# EAGLE board PiLoraGatewayV2.7 (EAGLE 6.5.0)
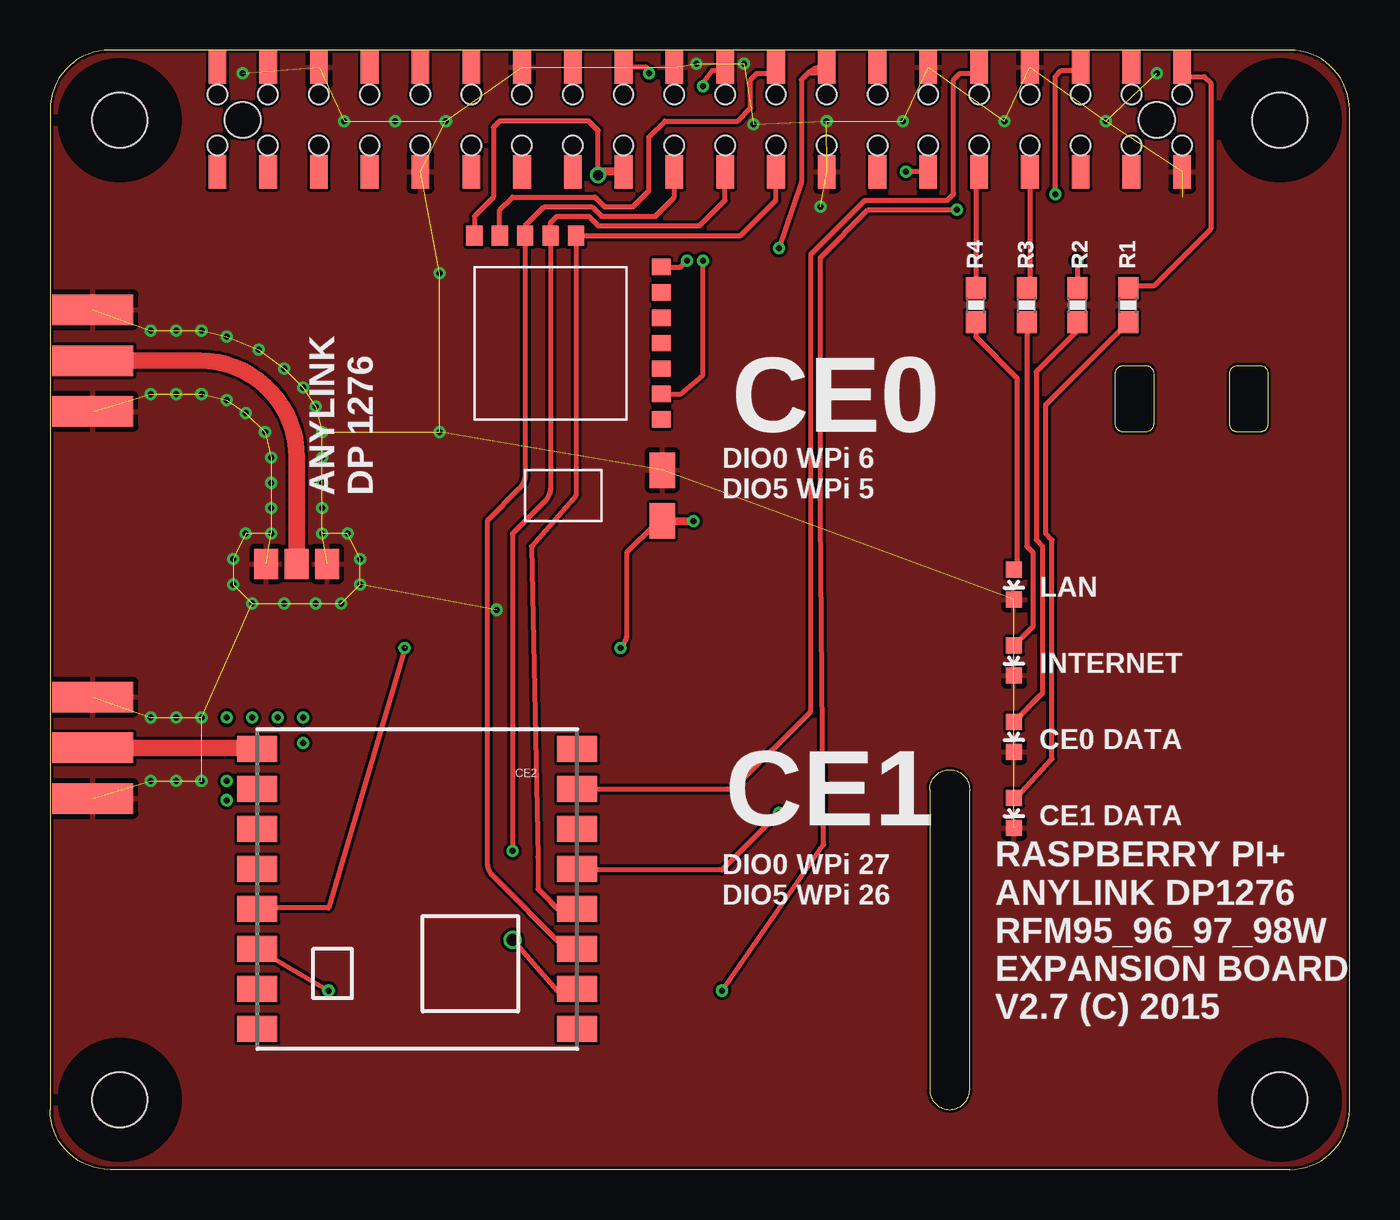
[diagram p0: board, top side]
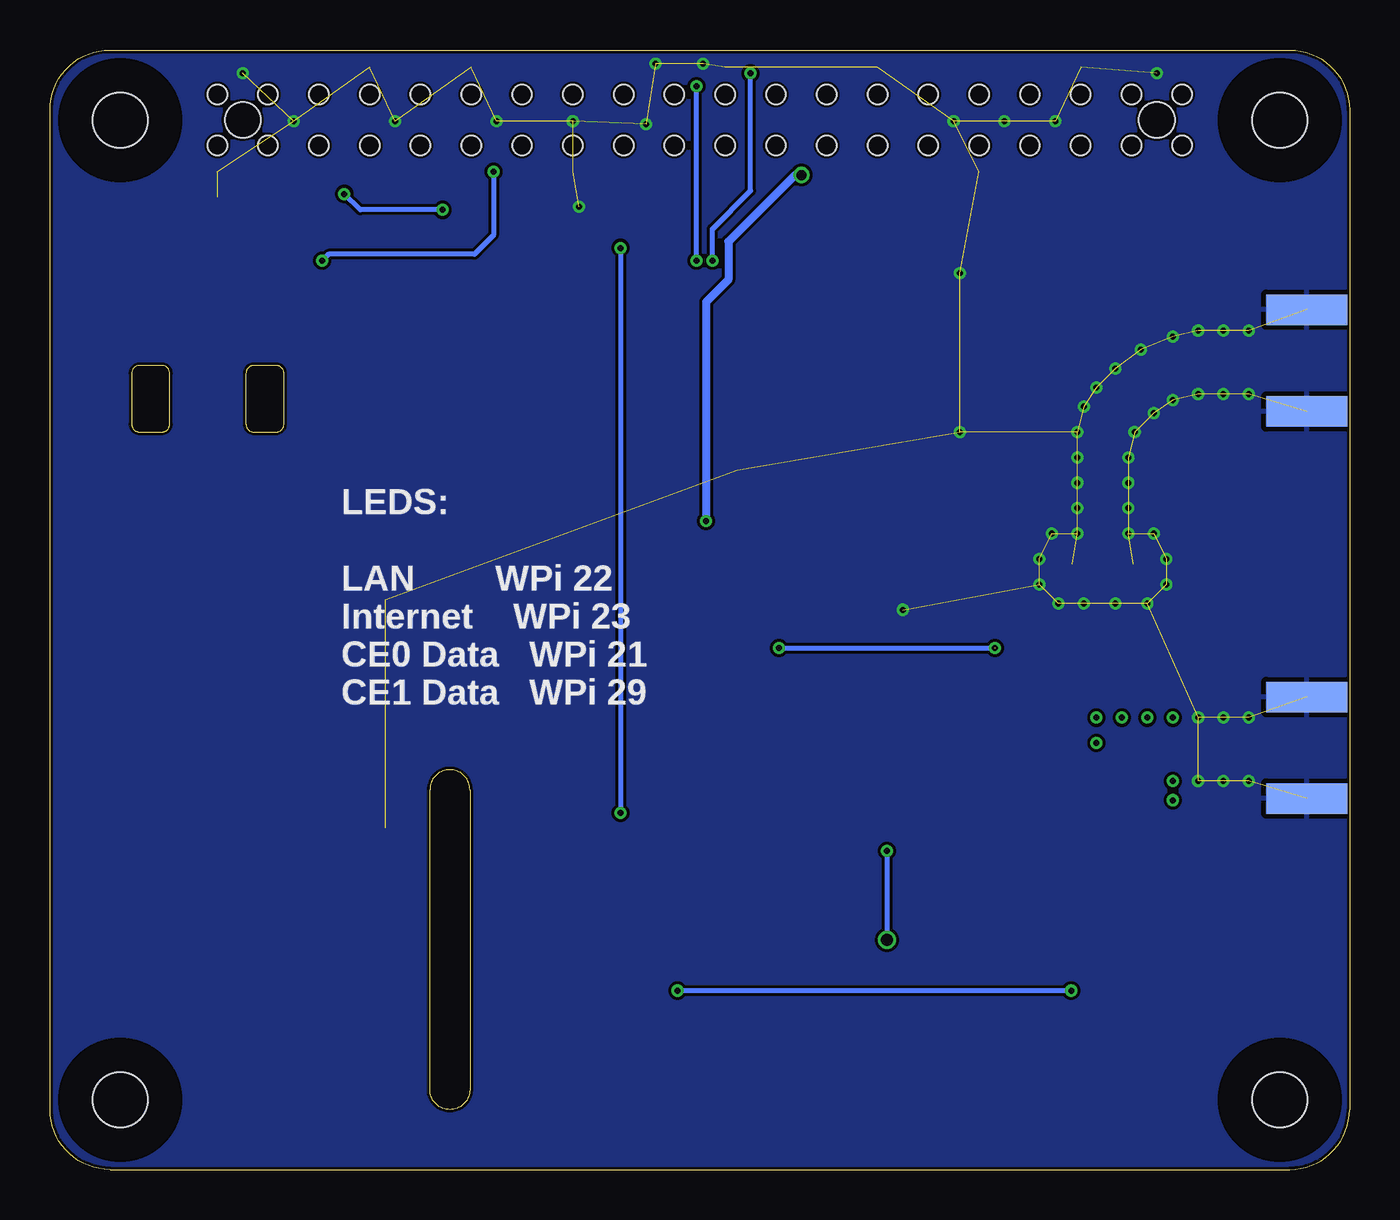
[diagram p1: board, bottom side, seen from below]

Size 65 x 56 mm. Coordinates in mm from the lower left corner, seen from the top.
Outline: 59.41,40.22 60.51,40.22 arc-90 60.92,39.82 60.92,37.29 arc-90 60.51,36.89 59.41,36.89 arc-90 59.01,37.29 59.01,39.82 arc-90 59.41,40.22
Outline: 53.69,40.22 54.8,40.22 arc-90 55.2,39.82 55.2,37.29 arc-90 54.8,36.89 53.69,36.89 arc-90 53.29,37.29 53.29,39.82 arc-90 53.69,40.22
Outline: 62,0 arc90 65,3 65,53 arc90 62,56 3,56 arc90 0,53 0,3 arc90 3,0 62,0
Outline: 44,19 44,4 arc90 45,3 arc90 46,4 46,19 arc90 45,20 arc90 44,19
Copper layers (1*16): Top 0.035mm / dielectric 1.5mm / Bottom 0.035mm
Design rules "hackvana": minimum track width 6mil, minimum drill 0.3mm, track to track 6mil, track to pad 6mil, pad to pad 6mil, via to via 6mil, smd to smd 0mil, copper to edge 6mil, drill to drill 6mil, minimum pad ring 10mil, minimum via ring 6mil, stop-mask expansion 2mil, vias tented up to drill 100mil, thermal gap 10mil
Net classes: 1 vcc: width 0.254 mm

## Footprints (pad centres in the part's own frame; a part is rotated, then mirrored left to right if it is on the bottom)
ANYLINK_DP1276 = smd 0.813 x 0.914: ZDIO0 8.89,-22.047; ZDIO1 10.16,-22.047; ZDIO2 11.43,-22.047; ZDIO3 12.7,-22.047; ZDIO4 13.97,-22.047; ZDIO5 15.24,-22.047; ZRESET 7.62,-22.047 | smd 1.778 x 1.27: ZGND 5.08,-22.098; ZVCC 2.54,-22.098 | smd 1.5 x 1.2: ZGND2 0.389,-2.286; ZGND3 0.389,-5.334; ZRFIO 0.389,-3.81 | smd 1.016 x 0.813: ZMISO 16.81,-16.51; ZMOSI 16.81,-15.24; ZNSS 16.81,-13.97; ZSCK 16.81,-17.78; ZVDD2 16.81,-12.7
RFM95_96_97_98W = smd 2 x 1.3: ANT 8,-7; DIO0 8,3; DIO1 8,5; DIO2 8,7; DIO3 8,-3; DIO4 8,-1; DIO5 -8,-5; GND1 -8,7; GND2 8,-5; GND3 -8,-7; MISO -8,5; MOSI -8,3; NSS -8,-1; RESET -8,-3; SCK -8,1; VCC 8,1
SMA-EDGE = smd 1.524 x 4.064: GND@0 -2.54,0; GND@1 2.54,0; SIG 0,0 | smd 1.524 x 4.064 bottom: GND@2 -2.54,0; GND@3 2.54,0
LED-0603 = smd 0.8 x 0.8: A 0,-0.75; C 0,0.75
0603-RES = smd 1.1 x 1: 1 -0.85,0; 2 0.85,0
RASPBERRY-PI-PLUS-CAM_NOTCH = smd 0.889 x 1.68: P$1 -34.13,21.905; P$2 -34.13,27.145; P$3 -31.59,21.905; P$4 -31.59,27.145; P$5 -29.05,21.905; P$6 -29.05,27.145; P$7 -26.51,21.905; P$8 -26.51,27.145; P$9 -23.97,21.905; P$10 -23.97,27.145; P$11 -21.43,21.905; P$12 -21.43,27.145; P$13 -18.89,21.905; P$14 -18.89,27.145; P$15 -16.35,21.905; P$16 -16.35,27.145; P$17 -13.81,21.905; P$18 -13.81,27.145; P$19 -11.27,21.905; P$20 -11.27,27.145; P$21 -8.73,21.905; P$22 -8.73,27.145; P$23 -6.19,21.905; P$24 -6.19,27.145; P$25 -3.65,21.905; P$26 -3.65,27.145; P$27 -1.11,21.905; P$28 -1.11,27.145; P$29 1.43,21.905; P$30 1.43,27.145; P$31 3.97,21.905; P$32 3.97,27.145; P$33 6.51,21.905; P$34 6.51,27.145; P$35 9.05,21.905; P$36 9.05,27.145; P$37 11.59,21.905; P$38 11.59,27.145; P$39 14.13,21.905; P$40 14.13,27.145 | hole 2.75: -39,24.5; 19,24.5; -39,-24.5; 19,-24.5 | hole 1.78: -32.86,24.5; 12.86,24.5 | hole 0.97: -34.13,25.77; -31.59,25.77; -29.05,25.77; -26.51,25.77; -23.97,25.77; -21.43,25.77; -18.89,25.77; -16.35,25.77; -13.81,25.77; -11.27,25.77; -8.73,25.77; -6.19,25.77; -3.65,25.77; -1.11,25.77; 1.43,25.77; 3.97,25.77; 6.51,25.77; 9.05,25.77; 11.59,25.77; 14.13,25.77; -34.13,23.23; -31.59,23.23; -29.05,23.23; -26.51,23.23; -23.97,23.23; -21.43,23.23; -18.89,23.23; -16.35,23.23; -13.81,23.23; -11.27,23.23; -8.73,23.23; -6.19,23.23; -3.65,23.23; -1.11,23.23; 1.43,23.23; 3.97,23.23; 6.51,23.23; 9.05,23.23; 11.59,23.23; 14.13,23.23

## Placement (x,y rotation side)
CE0  [ANYLINK_DP1276]  8.53,29.91 90 top
CE2  [RFM95_96_97_98W]  18.37,14.03 180 top
J$1  SMA_EDGE  [SMA-EDGE]  2.14,40.46 270 top
J$2  SMA_EDGE  [SMA-EDGE]  2.14,21.09 270 top
NET  Red  [LED-0603]  48.22,17.84 180 top
NET1  Red  [LED-0603]  48.22,25.46 180 top
OK  Yellow  [LED-0603]  48.22,21.65 180 top
OK1  Yellow  [LED-0603]  48.22,29.27 180 top
R1  330  [0603-RES]  53.93,43.24 90 top
R2  330  [0603-RES]  51.39,43.24 90 top
R3  330  [0603-RES]  48.85,43.24 90 top
R4  330  [0603-RES]  46.31,43.24 90 top
U$1  RASPBERRY-PI+  [RASPBERRY-PI-PLUS-CAM_NOTCH]  42.5,28 0 top

## Library data of the parts
CE0 = adafruit
CE2 U$1 = Ava
J$1 J$2 NET NET1 OK OK1 R1-R4 = SparkFun

## Nets
CE0/DATA_LED: R2.2 U$1.P$29
CE0/DIO0: CE0.ZDIO0 U$1.P$22
CE0/DIO5: CE0.ZDIO5 U$1.P$18
CE0/NSS: CE0.ZNSS U$1.P$24
CE1/DATA_LED: R1.2 U$1.P$40
CE1/DIO0: CE2.DIO0 U$1.P$36
CE1/DIO5: CE2.DIO5 U$1.P$32
CE1/NSS: CE2.NSS U$1.P$26
GND: CE0.ZGND CE0.ZGND2 CE0.ZGND3 J$1.GND@0 J$1.GND@1 J$1.GND@2 J$1.GND@3 J$2.GND@0 J$2.GND@1 J$2.GND@2 J$2.GND@3 NET1.C NET.C OK1.C OK.C U$1.P$6 U$1.P$9 U$1.P$14 U$1.P$20 U$1.P$25 U$1.P$30 U$1.P$34 U$1.P$39
INTERNET: R3.2 U$1.P$33
LAN: R4.2 U$1.P$31
MISO: CE0.ZMISO CE2.MISO U$1.P$21
MOSI: CE0.ZMOSI CE2.MOSI U$1.P$19
N$2: CE0.ZRFIO J$1.SIG
N$3: NET1.A R3.1
N$4: OK1.A R4.1
N$10: U$1.P$16
N$12: OK.A R2.1
N$17: NET.A R1.1
N$28: U$1.P$7
N$33: U$1.P$11
N$34: U$1.P$13
N$35: U$1.P$15
N$41: U$1.P$27
S$1: CE2.ANT J$2.SIG
SCK: CE0.ZSCK CE2.SCK U$1.P$23
VCC: CE0.ZVCC CE0.ZVDD2 CE2.VCC U$1.P$17

## Tracks (layer width: path | path; a pad name or v marks a point on that pad's centre or on a via)
CE0/DATA_LED  (via drill 0.3)
  Top 0.254: 51.55,44.25 R2.2 v51.39,45.46 | U$1.P$29 v42.82,49.91
  Bottom 0.254: v42.82,49.91 42.82,46.73 43.77,45.78 51.07,45.78 v51.39,45.46
CE0/DIO0  (via drill 0.3)
  Top 0.254: CE0.ZDIO0 31.55,38.8 32.66,39.75 v32.66,45.46 | v32.66,54.19 32.66,54.35 33.13,54.99 33.61,54.99 U$1.P$22
  Bottom 0.254: v32.66,45.46 v32.66,54.19
CE0/DIO5  (via drill 0.3)
  Top 0.254: CE0.ZDIO5 31.55,45.15 v31.86,45.46 | U$1.P$18 29.8,55.15 29.96,54.99 v29.96,54.83
  Bottom 0.254: v31.86,45.46 31.86,47.05 29.96,48.95 v29.96,54.83
CE0/NSS
  Top 0.254: CE0.ZNSS 22.5,48 23.13,48.64 27.26,48.64 27.74,48.16 29.16,48.16 29.96,48.95 29.96,51.65 30.75,52.45 34.4,52.45 35.04,53.08 35.04,54.51 35.36,54.83 35.99,54.83 U$1.P$24
CE1/DATA_LED
  Top 0.254: 54.09,44.25 R1.2 54.03,44.19 55.2,44.19 58.06,47.05 58.06,54.35 57.74,54.67 56.79,54.67 56.63,54.83 U$1.P$40
CE1/DIO0  (via drill 0.3)
  Top 0.254: 38.53,32.29 38.53,32.76 | 38.53,32.76 38.53,45.62 40.91,48 v45.36,48 | v50.28,48.8 50.28,54.67 50.6,54.99 51.39,54.99 U$1.P$36 | CE2.DIO0 v13.92,8.95 | v33.61,8.95 38.69,16.25 38.53,32.76
  Bottom 0.254: v45.36,48 49.48,48 v50.28,48.8 | v13.92,8.95 v33.61,8.95
CE1/DIO5
  Top 0.254: U$1.P$32 46.15,54.83 45.52,54.83 45.2,54.51 45.2,48.8 44.88,48.48 40.75,48.48 38.05,45.78 38.05,22.92 34.25,19.11 arc-45 34.05,19.03 CE2.DIO5
CE1/NSS  (via drill 0.3)
  Top 0.254: 37.58,54.51 37.9,54.83 38.69,54.83 38.85,54.99 U$1.P$26 38.64,55.15 arc45 37.93,54.85 37.59,54.5 37.59,49.4 v36.47,46.1 | v36.47,17.84 33.61,14.98 26.94,14.98 CE2.NSS
  Bottom 0.254: v36.47,46.1 v36.47,17.84
GND  (via drill 0.3)  (78 unrouted)
  other vias: 47.74,52.45 42.66,52.45 19.8,52.45 17.26,52.45 14.72,52.45 52.82,52.45 35.2,52.29 38.53,48.16 38.85,52.45 32.34,55.3 34.72,55.3 55.36,54.83 9.64,54.83 5.04,41.97 5.04,38.8 6.31,41.97 7.58,41.97 6.31,38.8 7.58,38.8 8.84,38.48 9.8,37.84 10.75,36.89 11.07,35.62 11.07,34.35 11.07,33.08 11.07,31.81 8.84,41.65 10.43,41.02 11.7,40.06 12.65,39.11 13.29,38.16 13.61,36.89 13.61,35.62 13.61,34.35 13.61,33.08 13.61,31.81 9.8,31.81 14.88,31.81 15.51,30.54 9.16,30.54 9.16,29.27 15.51,29.27 14.56,28.32 13.29,28.32 10.11,28.32 11.7,28.32 19.48,44.83 22.34,28 19.48,36.89 5.04,22.6 5.04,19.43 6.31,22.6 7.58,22.6 6.31,19.43 7.58,19.43
  pour Top: 0,56 65.32,56 65,0 -0.32,0
  pour Bottom: 0,56 65.32,56 65,0 -0.32,0
INTERNET
  Top 0.254: U$1.P$33 49.01,44.25 R3.2
LAN
  Top 0.254: 46.47,44.25 R4.2 46.31,49.91 U$1.P$31
MISO  (via drill 0.3, 0.6)
  Top 0.254: U$1.P$21 33.77,48.48 32.5,47.21 27.42,47.21 26.94,47.69 25.36,47.69 25.04,47.37 CE0.ZMISO 25.04,34.13 arc-45 24.74,33.42 23.13,31.81 v23.13,15.93 | v23.13,11.49 25.36,8.95 CE2.MISO
  Bottom 0.254: v23.13,15.93 v23.13,11.49
MOSI
  Top 0.254: U$1.P$19 31.23,48.64 30.28,47.69 27.58,47.69 27.1,48.16 24.72,48.16 23.77,47.21 CE0.ZMOSI 23.77,34.76 arc-45 23.47,34.06 21.86,32.45 21.86,15.4 arc45 22.16,14.69 25.67,11.17 26.03,11.17 arc-45 CE2.MOSI
N$2
  Top 0.813: J$1.SIG 7.5,40.46 arc-90 12.34,35.62 CE0.ZRFIO
N$3
  Top 0.254: R3.1 48.85,31.18 49.17,30.86 49.17,27.16 NET1.A
N$4
  Top 0.254: R4.1 46.31,41.65 48.37,39.59 48.37,30.18 OK1.A
N$12
  Top 0.254: R2.1 51.39,41.97 49.33,39.91 49.33,31.49 49.64,31.18 49.64,23.83 OK.A
N$17
  Top 0.254: NET.A 48.33,18.59 50.12,20.54 50.12,31.49 49.8,31.81 49.8,38.26 R1.1
S$1
  Top 0.406: 10.37,21.09 CE2.ANT
  Top 0.813: J$2.SIG 10.37,21.09
S$2  (via drill 0.3)
  other vias: 8.84,22.6
S$3  (via drill 0.3)
  other vias: 10.11,22.6
S$4  (via drill 0.3)
  other vias: 11.38,22.6
S$6  (via drill 0.3)
  other vias: 12.65,22.6
S$7  (via drill 0.3)
  other vias: 12.65,21.33
S$8  (via drill 0.3)
  other vias: 8.84,19.43
S$9  (via drill 0.3)
  other vias: 8.84,18.48
SCK
  Top 0.254: U$1.P$23 36.31,48.48 34.54,46.71 CE0.ZSCK 26.31,33.71 24.09,31.18 24.4,15.62 24.4,14.03 25.67,12.76 CE2.SCK
VCC  (via drill 0.3, 0.5)  (1 unrouted)
  Top 0.254: v27.42,49.75 27.42,51.97 26.94,52.45 22.5,52.45 22.18,52.13 22.18,48.64 21.23,47.69 CE0.ZVDD2 | CE0.ZVCC arc45 30.3,32.31 28.85,30.86 28.85,26.83 arc-45 28.55,26.12 v28.53,26.09 | v17.74,26.09 17.51,26.09 | 17.76,26.12 13.92,13.08 10.48,13.08 arc45 CE2.VCC
  Top 0.406: U$1.P$17 27.58,49.91 v27.42,49.75 | CE0.ZVCC v32.18,32.45
  Bottom 0.254: v28.53,26.09 v17.74,26.09
  Bottom 0.406: v27.42,49.75 27.74,49.75 31.07,46.41 31.07,44.51 32.18,43.4 v32.18,32.45

## Text on the board
tPlace: CE0 | DIO0 WPi 6 / DIO5 WPi 5 | LAN | INTERNET | CE0 DATA | CE1 | CE1 DATA | DIO0 WPi 27 / DIO5 WPi 26 | RASPBERRY PI+ / ANYLINK DP1276 / RFM95_96_97_98W / EXPANSION BOARD / V2.7 (C) 2015
bPlace: LEDS: / / LAN WPi 22 / Internet WPi 23 / CE0 Data WPi 21 / CE1 Data WPi 29
_tNames: R4 | R3 | R2 | R1